# EAGLE board PowerNode2 (EAGLE 9.5.2)
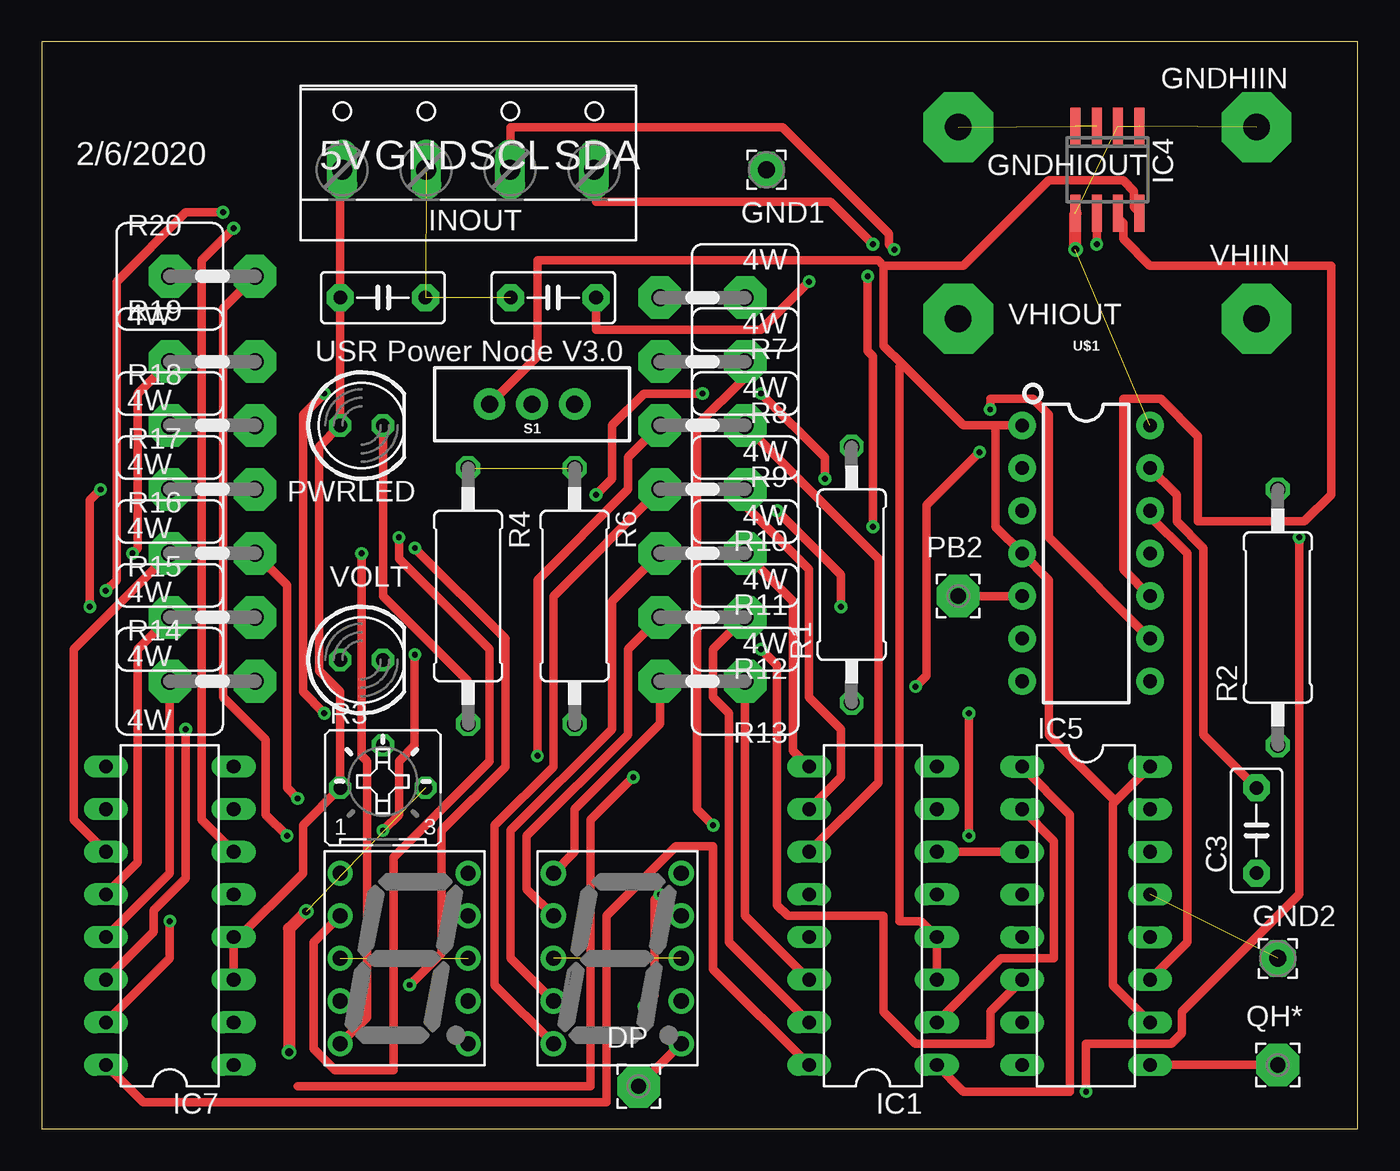
[diagram p0: board, top side]
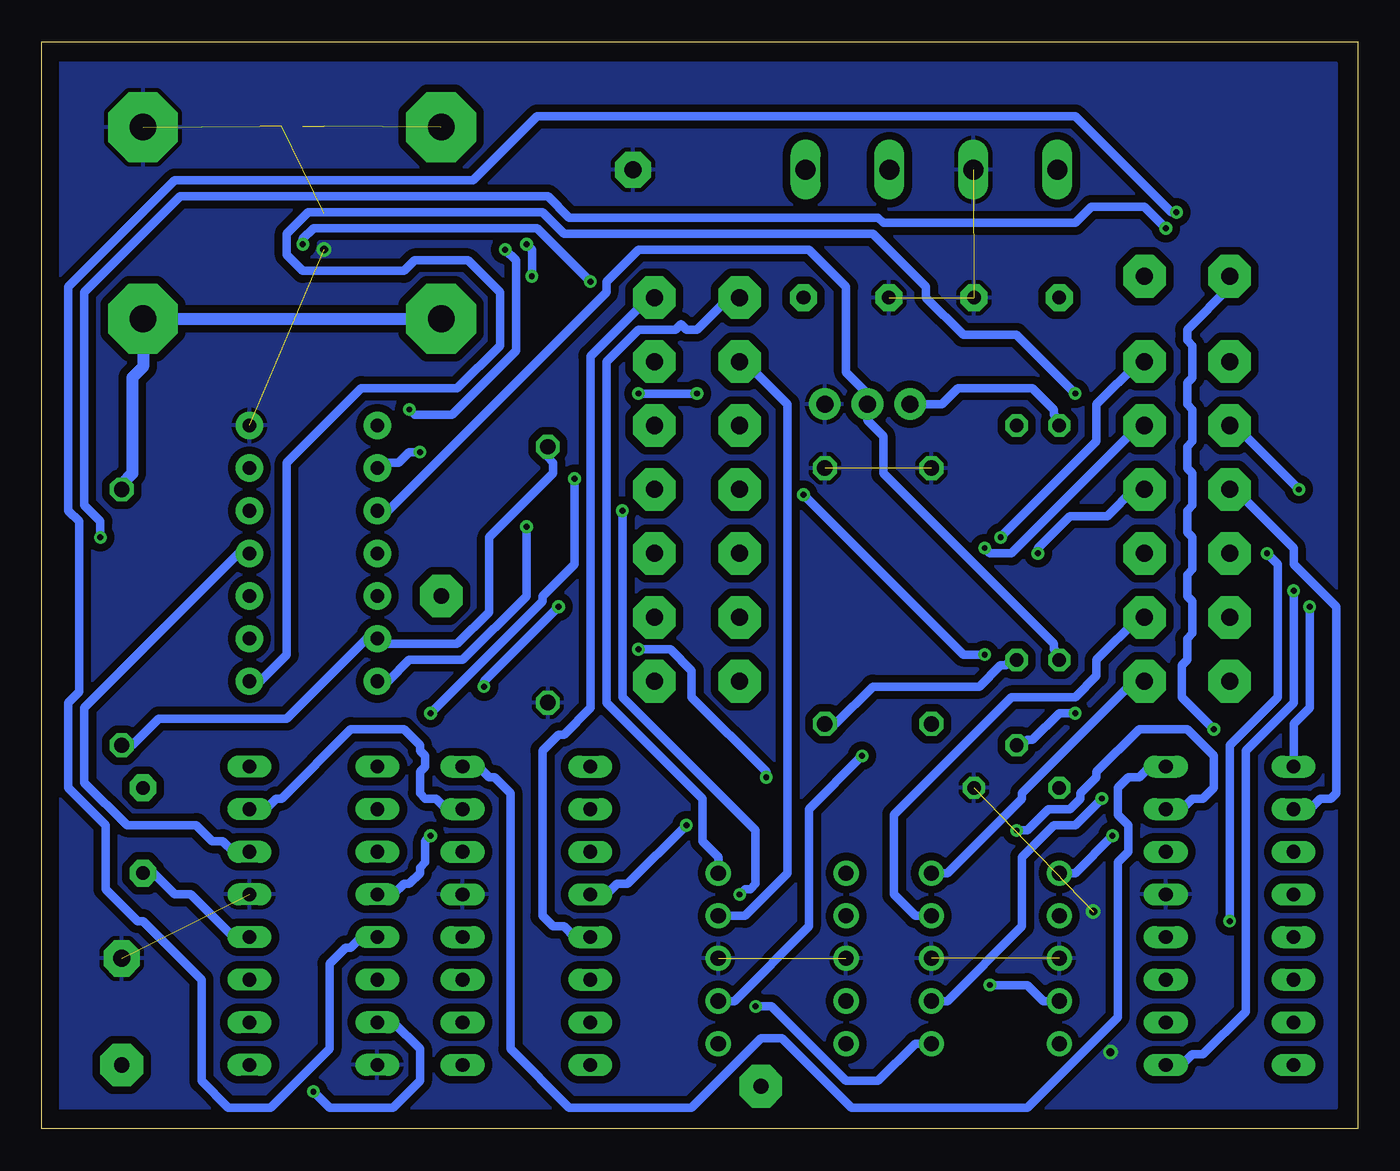
[diagram p1: board, bottom side, seen from below]

Size 78.41 x 64.76 mm. Coordinates in mm from the lower left corner, seen from the top.
Outline: 0,0 78.41,0 78.41,64.76 0,64.76 0,0
Copper layers (1*16): Top 0.035mm / dielectric 1.5mm / Bottom 0.035mm
Design rules "default": minimum track width 6mil, minimum drill 0.35mm, track to track 6mil, track to pad 6mil, pad to pad 6mil, via to via 6mil, smd to smd 6mil, copper to edge 40mil, drill to drill 6mil, minimum pad ring 10mil, minimum via ring 8mil, stop-mask expansion 4mil, vias tented up to drill 0mil, thermal gap 10mil
Net classes: 0 default: width 0.508 mm, drill 0.305 mm, clearance 0.305 mm; 1 high power: width 0.711 mm, drill 0.457 mm, clearance 0.457 mm
tRestrict: area 50.8,55.9 to 63,63.5; area 64,55.9 to 76.2,63.5; area 50.8,36.8 to 76.2,50.8

## Footprints (pad centres in the part's own frame; a part is rotated, then mirrored left to right if it is on the bottom)
C5B3 = drill 0.813 pad 1.6 octagon: 1 -2.54,0; 2 2.54,0
2,54/0,9 = drill 0.914 pad 2.54 octagon: 1 0,0
2,15/1,0 = drill 1.016 pad 2.159 octagon: 1 0,0
4,16O1,6 = drill 1.6 pad 4.166 octagon: 1 0,0
DIL16 = drill 0.813 long: 1 -8.89,-3.81; 2 -6.35,-3.81; 3 -3.81,-3.81; 4 -1.27,-3.81; 5 1.27,-3.81; 6 3.81,-3.81; 7 6.35,-3.81; 8 8.89,-3.81; 9 8.89,3.81; 10 6.35,3.81; 11 3.81,3.81; 12 1.27,3.81; 13 -1.27,3.81; 14 -3.81,3.81; 15 -6.35,3.81; 16 -8.89,3.81
SOIC8 = smd 0.6 x 2.2: 1 -1.905,-2.6; 2 -0.635,-2.6; 3 0.635,-2.6; 4 1.905,-2.6; 5 1.905,2.6; 6 0.635,2.6; 7 -0.635,2.6; 8 -1.905,2.6
W237-4 = drill 1.194 long: 1 -7.5,-1.27; 2 -2.5,-1.27; 3 2.5,-1.27; 4 7.5,-1.27
S4301B = drill 0.9 pad 1.5: 1 -3.81,5.08; 2 -3.81,2.54; 3 -3.81,0; 4 -3.81,-2.54; 5 -3.81,-5.08; 6 3.81,-5.08; 7 3.81,-2.54; 8 3.81,0; 9 3.81,2.54; 10 3.81,5.08
LED5MM = drill 0.813 octagon: A -1.27,0; K 1.27,0
0411/15 = drill 0.914 octagon: 1 -7.62,0; 2 7.62,0
B25P = drill 0.813 octagon: A -2.54,0; E 2.54,0; S 0,2.54
KH206-8R = drill 1.016 pad 2.54 octagon: 1 -2.54,0; 2 2.54,0
SWITCH_SPDT_PTH_11.6X4.0MM = drill 1.016 pad 1.88: 1 0,2.54; 2 0,0; 3 0,-2.54
DIP14 = drill 0.813 pad 1.626: 1 -7.62,-3.81; 2 -5.08,-3.81; 3 -2.54,-3.81; 4 0,-3.81; 5 2.54,-3.81; 6 5.08,-3.81; 7 7.62,-3.81; 8 7.62,3.81; 9 5.08,3.81; 10 2.54,3.81; 11 0,3.81; 12 -2.54,3.81; 13 -5.08,3.81; 14 -7.62,3.81

## Placement (x,y rotation side)
C1  1nF  [C5B3]  30.48,49.53 180 top
C2  0.1uF  [C5B3]  20.32,49.53 0 top
C3  0.1uF  [C5B3]  72.39,17.78 90 top
DP  [2,54/0,9]  35.56,2.54 0 top
GND1  [2,15/1,0]  43.18,57.15 0 top
GND2  [2,15/1,0]  73.66,10.16 0 top
GNDHIIN  WIREPAD4,16O1,6  [4,16O1,6]  72.39,59.69 0 top
GNDHIOUT  WIREPAD4,16O1,6  [4,16O1,6]  54.61,59.69 0 top
IC1  4511N  [DIL16]  49.53,12.7 90 top
IC4  ACS712-LC  [SOIC8]  63.5,57.15 180 top
IC5  74LS595N  [DIL16]  62.23,12.7 270 top
IC7  4511N  [DIL16]  7.62,12.7 90 top
INOUT  [W237-4]  25.4,58.42 0 top
LED1  S4301B  [S4301B]  34.29,10.16 0 top
LED2  S4301B  [S4301B]  21.59,10.16 0 top
PB2  [2,54/0,9]  54.61,31.75 0 top
PWRLED  [LED5MM]  19.05,41.91 0 top
QH*  [2,54/0,9]  73.66,3.81 0 top
R1  300k  [0411/15]  48.26,33.02 90 top
R2  1.2M  [0411/15]  73.66,30.48 90 top
R3  [B25P]  20.32,20.32 0 top
R4  330  [0411/15]  25.4,31.75 270 top
R6  330  [0411/15]  31.75,31.75 270 top
R7  330  [KH206-8R]  39.37,49.53 180 top
R8  300k  [KH206-8R]  39.37,45.72 180 top
R9  300k  [KH206-8R]  39.37,41.91 180 top
R10  300k  [KH206-8R]  39.37,38.1 180 top
R11  300k  [KH206-8R]  39.37,34.29 180 top
R12  300k  [KH206-8R]  39.37,30.48 180 top
R13  300k  [KH206-8R]  39.37,26.67 180 top
R14  300k  [KH206-8R]  10.16,26.67 0 top
R15  300k  [KH206-8R]  10.16,30.48 0 top
R16  300k  [KH206-8R]  10.16,34.29 0 top
R17  300k  [KH206-8R]  10.16,38.1 0 top
R18  300k  [KH206-8R]  10.16,41.91 0 top
R19  300k  [KH206-8R]  10.16,45.72 0 top
R20  300k  [KH206-8R]  10.16,50.8 0 top
S1  [SWITCH_SPDT_PTH_11.6X4.0MM]  29.21,43.18 90 top
U$1  ATTINY84ATTINY84-20PU  [DIP14]  62.23,34.29 270 top
VHIIN  WIREPAD4,16O1,6  [4,16O1,6]  72.39,48.26 0 top
VHIOUT  WIREPAD4,16O1,6  [4,16O1,6]  54.61,48.26 0 top
VOLT  [LED5MM]  19.05,27.94 0 top

## Library data of the parts
C1-C3 = capacitor-wima
DP GND1 GND2 GNDHIIN GNDHIOUT PB2 QH* VHIIN VHIOUT = wirepad
IC1 IC7 = 45xx
IC4 = allegro-2
IC5 = 74xx-us
INOUT = con-wago-500; OC_FARNELL: unknown; OC_NEWARK: unknown
LED1 LED2 = led-7-segment; OC_FARNELL: unknown; OC_NEWARK: unknown
PWRLED VOLT = led
R1 R2 R4 R6 = resistor
R3 = pot
R7-R20 = resistor-power; OC_FARNELL: unknown; OC_NEWARK: unknown
S1 = SparkFun-Switches; PROD_ID: SWCH-08261; SF_SKU: COM-00102
U$1 = SparkFun-IC-Microcontroller

## Nets
CALIB: R3.S U$1.8
CURRIN: IC4.7 U$1.10
DISPSEL: S1.2 U$1.3 VOLT.A
GND [high power]: C1.2 C2.2 GND1.1 GND2.1 GNDHIIN.1 IC1.5 IC4.1 IC4.2 IC4.5 IC5.8 IC5.13 IC7.5 INOUT.2 LED1.3 LED1.8 LED2.3 LED2.8 R1.1 R3.E R4.1 R6.1 S1.3 U$1.14
GNDHIOUT: GNDHIOUT.1 IC4.3 IC4.4
N$1: C1.1 IC4.6
N$2: IC5.14 U$1.11
N$3: IC1.13 R7.1
N$5: IC1.12 R8.1
N$7: IC1.11 R9.1
N$8: IC1.10 R10.1
N$9: IC1.9 R11.1
N$10: IC1.15 R12.1
N$11: IC1.14 R13.1
N$12: IC1.7 IC5.15
N$13: IC1.1 IC5.1
N$14: IC1.2 IC5.2
N$15: IC1.6 IC5.3
N$16: LED1.10 R7.2
N$17: LED1.9 R8.2
N$18: LED1.7 R9.2
N$19: LED1.5 R10.2
N$20: LED1.4 R11.2
N$21: LED1.2 R12.2
N$22: LED1.1 R13.2
N$23: IC7.13 R14.1
N$24: IC7.12 R15.1
N$25: IC7.11 R16.1
N$26: IC7.10 R17.1
N$27: IC7.9 R18.1
N$28: IC5.11 U$1.12
N$29: C3.1 IC5.12
N$30: C3.2 U$1.13
N$31: LED2.6 U$1.2
N$32: PB2.1 U$1.5
N$33: PWRLED.K R4.2
N$35: R6.2 VOLT.K
N$37: IC5.9 QH*.1
N$38: IC7.15 R19.1
N$39: DP.1 LED1.6
N$40: IC7.14 R20.1
N$41: LED2.10 R14.2
N$42: LED2.9 R15.2
N$43: LED2.7 R16.2
N$44: LED2.5 R17.2
N$45: LED2.4 R18.2
N$46: LED2.2 R19.2
N$47: LED2.1 R20.2
N$48: IC5.4 IC7.7
N$49: IC5.5 IC7.1
N$50: IC5.6
N$51: IC5.7 IC7.6
SCL: INOUT.3 U$1.9
SDA: INOUT.4 U$1.7
VCC: C2.1 IC1.3 IC1.4 IC4.8 IC5.10 IC5.16 IC7.3 IC7.4 INOUT.1 PWRLED.A R3.A S1.1 U$1.1 U$1.4
VDD: IC1.16 IC7.16
VHI [high power]: R2.2 VHIIN.1 VHIOUT.1
VHIOUT: R1.2 R2.1 U$1.6
VSS: IC1.8 IC7.8

## Tracks (layer width: path | path; a pad name or v marks a point on that pad's centre or on a via)
CALIB  (via drill 0.35)
  Top 0.508: v16.83,24.77 15.56,26.04 15.56,42.55 v16.83,43.81
  Bottom 0.508: R3.S 20,22.86 19.68,23.18 19.37,23.18 17.78,24.77 v16.83,24.77 | v16.83,43.81 20.32,47.31 23.5,47.31 25.72,49.53 25.72,50.16 28.89,53.34 47.31,53.34 48.58,54.61 62.55,54.61 63.82,53.34 63.82,52.07 62.87,51.12 56.83,51.12 56.2,51.75 53.02,51.75 51.12,49.85 51.12,46.67 53.66,44.13 59.37,44.13 63.82,39.69 63.82,28.26 65.41,26.67 U$1.8
CURRIN
  Top 0.508: U$1.10 64.45,33.34 64.45,43.5 66.67,43.5 68.9,41.27 68.9,36.2 75.25,36.2 76.83,37.78 76.83,51.44 66.04,51.44 64.45,53.02 64.45,53.98 64.14,54.29 IC4.7
DISPSEL
  Bottom 0.508: VOLT.A 17.78,28.26 18.1,28.57 18.1,28.89 28.26,39.05 28.26,41.27 29.21,42.23 S1.2 29.21,43.81 30.48,45.09 30.48,50.16 32.7,52.39 42.86,52.39 44.77,50.48 44.77,49.85 57.78,36.83 U$1.3
GND  (via drill 0.46)  (11 unrouted)
  Top 0.711: v61.59,52.39 IC4.5 | v15.75,12.95 14.73,11.94 v14.73,4.57
  pour Bottom: 1.27,63.5 77.47,63.5 77.47,1.27 1.27,1.27
  pour Top: 76.2,60.96 73.66,63.5 64.77,63.5 64.01,62.74 64.01,57.91 64.77,57.15 68.58,57.15 69.85,55.88 74.93,55.88 76.2,57.15
GNDHIOUT  (2 unrouted)
  pour Top: 50.8,60.96 53.34,63.5 62.23,63.5 62.99,62.74 62.99,57.91 62.23,57.15 59.69,57.15 58.42,55.88 52.07,55.88 50.8,57.15
N$1  (via drill 0.35)
  Top 0.508: v62.87,52.7 IC4.6 | v45.72,50.48 42.86,47.62 33.02,47.62 C1.1
  Bottom 0.508: v62.87,52.7 62.87,53.02 62.23,53.66 48.9,53.66 v45.72,50.48
N$2
  Bottom 0.508: IC5.14 66.99,16.51 67.63,17.14 68.26,17.14 69.22,18.1 73.34,18.1 75.88,20.64 75.88,25.08 66.67,34.29 U$1.11
N$3
  Bottom 0.508: IC1.13 46.67,11.43 47.31,12.06 47.94,12.06 48.58,12.7 48.58,22.54 47.62,23.5 47.31,23.5 45.72,25.08 45.72,46.04 42.23,49.53 R7.1
N$5  (via drill 0.35)
  Top 0.508: v40.01,18.1 39.05,19.05 39.05,41.91 41.91,44.77 R8.1
  Bottom 0.508: IC1.12 44.77,13.97 44.13,14.61 43.5,14.61 v40.01,18.1
N$7
  Top 0.508: IC1.11 49.85,20.64 49.85,33.97 R9.1
N$8
  Top 0.508: IC1.10 47.62,20.95 47.62,23.81 45.72,25.72 45.72,33.34 41.91,37.15 R10.1
N$9
  Top 0.508: IC1.9 44.77,22.54 44.77,31.43 R11.1
N$10
  Top 0.508: IC1.15 40.96,11.11 40.96,24.77 40.01,25.72 40.01,28.57 R12.1
N$11
  Top 0.508: IC1.14 41.91,12.7 R13.1
N$12
  Bottom 0.508: IC1.7 54.29,19.05 54.93,19.68 55.56,19.68 55.88,20 55.88,21.27 55.56,21.59 55.56,22.23 55.88,22.54 55.88,22.86 56.83,23.81 60.01,23.81 64.14,19.68 64.45,19.68 65.09,19.05 IC5.15
N$13
  Top 0.508: IC1.1 54.93,2.22 61.28,2.22 61.28,18.73 IC5.1
N$14
  Top 0.508: IC1.2 57.15,10.16 60.33,10.16 60.33,17.14 IC5.2
N$15
  Top 0.508: IC5.3 IC1.6
N$16
  Bottom 0.508: LED1.10 38.1,16.19 39.05,17.14 39.05,19.68 44.77,25.4 44.77,45.72 42.86,47.62 40.64,47.62 40.32,47.94 40.01,47.62 39.37,47.62 37.47,49.53 R7.2
N$17
  Bottom 0.508: LED1.9 36.51,12.7 33.97,15.24 33.97,43.18 36.51,45.72 R8.2
N$18  (via drill 0.35)
  Top 0.508: v29.53,22.23 29.53,32.7 34.92,38.1 34.92,40.01 R9.2
  Bottom 0.508: LED1.7 37.15,7.62 32.7,12.06 32.7,19.05 v29.53,22.23
N$19
  Top 0.508: LED1.5 26.99,8.57 26.99,18.1 30.48,21.59 30.48,31.75 R10.2
N$20
  Top 0.508: LED1.4 27.94,10.16 27.94,17.78 33.97,23.81 33.97,31.43 R11.2
N$21
  Top 0.508: LED1.2 28.89,14.29 28.89,17.46 34.92,23.5 34.92,28.57 R12.2
N$22
  Top 0.508: LED1.1 31.75,16.51 31.75,19.05 36.83,24.13 R13.2
N$23
  Top 0.508: IC7.13 7.62,15.24 R14.1
N$24
  Top 0.508: IC7.12 5.71,15.88 5.71,28.57 R15.1
N$25
  Top 0.508: IC7.11 1.91,18.41 1.91,28.57 R16.1
N$26
  Bottom 0.508: IC7.10 2.86,19.05 2.22,19.68 1.59,19.68 1.27,20 1.27,31.11 3.81,33.66 3.81,34.61 7.3,38.1 R17.1
N$27  (via drill 0.35)
  Top 0.508: v2.86,31.11 2.86,37.47 v3.49,38.1
  Bottom 0.508: IC7.9 3.81,24.13 2.86,25.08 v2.86,31.11 | v3.49,38.1 7.3,41.91 R18.1
N$28
  Top 0.508: IC5.11 68.26,11.11 68.26,34.29 66.04,36.51 U$1.12
N$29
  Bottom 0.508: IC5.12 66.99,11.43 69.53,13.97 70.48,13.97 71.75,15.24 C3.1
N$30
  Top 0.508: C3.2 69.22,23.5 69.22,34.61 67.63,36.2 67.63,37.78 U$1.13
N$31  (via drill 0.35)
  Top 0.508: v35.88,7.3 36.51,7.94 36.51,13.65 v36.83,13.97 | v43.81,36.83 47.62,33.02 v47.62,31.11 | v52.07,26.35 52.7,26.99 52.7,37.15 v55.88,40.32
  Bottom 0.508: LED2.6 26.35,5.08 28.57,2.86 30.48,2.86 34.92,7.3 v35.88,7.3 | v36.83,13.97 36.51,14.29 36.2,14.29 35.88,14.61 35.88,17.78 43.81,25.72 v43.81,36.83 | v47.62,31.11 52.07,26.67 v52.07,26.35 | v55.88,40.32 56.52,40.32 57.15,39.69 58.1,39.69 U$1.2
N$32
  Top 0.508: PB2.1 U$1.5
N$33
  Top 0.508: PWRLED.K 20.32,31.75 25.4,26.67 R4.2
N$35
  Bottom 0.508: VOLT.K 20.64,27.94 20.95,27.62 21.27,27.62 22.54,26.35 28.89,26.35 31.11,24.13 R6.2
N$37
  Top 0.508: QH*.1 IC5.9
N$38  (via drill 0.35)
  Top 0.508: IC7.15 7.62,10.16 v7.62,12.38 | v5.4,34.29 5.71,34.61 5.71,43.81 R19.1
  Bottom 0.508: v7.62,12.38 7.62,22.86 4.76,25.72 4.76,33.66 v5.4,34.29
N$39
  Top 0.508: DP.1 LED1.6
N$40  (via drill 0.35)
  Top 0.508: IC7.14 6.67,11.75 6.67,13.02 8.57,14.92 v8.57,23.81
  Bottom 0.508: v8.57,23.81 10.48,25.72 10.48,27.62 10.16,27.94 10.16,29.21 9.84,29.53 9.84,31.43 10.16,31.75 10.16,33.02 9.84,33.34 9.84,35.24 10.16,35.56 10.16,36.83 9.84,37.15 9.84,39.05 10.16,39.37 10.16,40.64 9.84,40.96 9.84,42.86 10.16,43.18 10.16,44.45 9.84,44.77 9.84,46.67 10.16,46.99 10.16,47.62 7.62,50.16 R20.1
N$41
  Bottom 0.508: LED2.10 24.45,15.24 20,19.68 20,20 13.34,26.67 R14.2
N$42
  Bottom 0.508: LED2.9 26.35,12.7 27.62,13.97 27.62,18.73 20.64,25.72 16.83,25.72 15.56,26.99 15.56,27.94 13.02,30.48 R15.2
N$43  (via drill 0.35)
  Top 0.508: v15.24,19.68 14.61,20.32 14.61,32.38 R16.2
  Bottom 0.508: LED2.7 24.45,7.62 20,12.06 20,16.19 18.1,18.1 16.83,18.1 v15.24,19.68
N$44  (via drill 0.35)
  Top 0.508: LED2.5 19.37,6.67 19.37,21.91 19.05,22.23 v19.05,34.29
  Bottom 0.508: v19.05,34.29 19.05,34.61 17.14,36.51 14.92,36.51 13.34,38.1 R17.2
N$45  (via drill 0.35)
  Top 0.508: v21.91,8.57 23.81,10.48 23.81,17.78 27.62,21.59 27.62,29.21 v22.23,34.61
  Bottom 0.508: LED2.4 18.73,7.62 19.68,8.57 v21.91,8.57 | v22.23,34.61 21.91,34.29 20.64,34.29 13.02,41.91 R18.2
N$46  (via drill 0.35)
  Top 0.508: LED2.2 16.19,11.11 16.19,4.76 17.46,3.49 20.95,3.49 20.95,16.19 26.67,21.91 26.67,28.57 21.27,33.97 v21.27,35.24
  Bottom 0.508: v21.27,35.24 15.56,40.96 15.56,43.18 13.02,45.72 R19.2
N$47  (via drill 0.35)
  Top 0.508: v14.61,17.46 13.34,18.73 13.34,23.18 10.79,25.72 10.79,48.9 R20.2
  Bottom 0.508: LED2.1 16.83,15.24 v14.61,17.46
N$48  (via drill 0.35)
  Top 0.508: v20.32,17.78 21.27,18.73 21.27,21.91 22.23,22.86 v22.23,28.26 | v33.02,37.78 33.97,38.73 33.97,41.91 35.88,43.81 v39.37,43.81 | v42.86,43.81 46.67,40.01 v46.67,38.73 | v55.24,17.46 v55.24,24.77
  Bottom 0.508: IC7.7 10.48,19.05 9.84,19.68 9.21,19.68 8.57,20.32 8.57,22.23 10.16,23.81 13.02,23.81 15.56,21.27 15.56,20.95 16.51,20 16.51,19.68 17.14,19.05 18.41,19.05 19.68,17.78 v20.32,17.78 | v22.23,28.26 23.5,28.26 v33.02,37.78 | v42.86,43.81 v39.37,43.81 | v46.67,38.73 46.67,33.66 48.58,31.75 48.58,31.43 v55.24,24.77 | v55.24,17.46 55.56,17.14 55.56,15.88 55.88,15.56 55.88,15.24 56.52,14.61 56.83,14.61 57.47,13.97 IC5.4
N$49  (via drill 0.35)
  Top 0.508: v3.81,32.07 4.45,32.7 4.45,50.48 8.57,54.61 v10.79,54.61
  Bottom 0.508: IC7.1 10.48,3.81 9.84,4.45 9.21,4.45 6.67,6.99 6.67,22.54 3.81,25.4 v3.81,32.07 | v10.79,54.61 11.11,54.61 16.83,60.33 48.9,60.33 52.7,56.52 70.48,56.52 76.83,50.16 76.83,36.83 76.2,36.2 76.2,26.04 76.83,25.4 76.83,20.32 74.61,18.1 74.61,14.29 72.71,12.38 72.39,12.38 68.9,8.89 68.9,2.86 67.31,1.27 64.77,1.27 61.28,4.76 61.28,9.84 60.33,10.79 60.01,10.79 59.37,11.43 IC5.5
N$50  (via drill 0.35)
  Top 0.508: 15.24,2.54 32.7,2.54 32.7,18.41 v35.24,20.95 | v42.86,28.57 43.81,27.62 43.81,13.34 44.45,12.7 50.16,12.7 50.16,6.99 52.07,5.08 56.52,5.08 56.52,6.99 IC5.6
  Bottom 0.508: v35.24,20.95 35.24,21.27 39.69,25.72 39.69,27.3 40.96,28.57 v42.86,28.57
N$51  (via drill 0.35)
  Top 0.508: IC7.6 9.53,18.41 9.53,51.75 v11.43,53.66 | v74.93,35.24 74.93,13.97 67.94,6.99 67.94,5.71 67.31,5.08 62.23,5.08 v62.23,2.22
  Bottom 0.508: v11.43,53.66 12.7,54.93 15.88,54.93 16.83,53.98 28.26,53.98 28.57,54.29 46.99,54.29 48.26,55.56 70.17,55.56 75.88,49.85 75.88,37.15 74.93,36.2 v74.93,35.24 | v62.23,2.22 61.28,1.27 57.47,1.27 55.88,2.86 55.88,4.76 57.47,6.35 IC5.7
SCL  (via drill 0.35)
  Top 0.508: U$1.9 60.01,35.24 60.01,42.55 59.05,43.5 56.52,43.5 v56.52,42.86 | v50.8,52.39 50.48,52.7 50.48,53.34 44.13,59.69 27.94,59.69 27.94,57.15 INOUT.3
  Bottom 0.508: v56.52,42.86 56.2,42.55 53.98,42.55 50.16,46.35 50.16,51.75 v50.8,52.39
SDA  (via drill 0.35)
  Top 0.508: v49.53,35.88 49.53,46.04 49.21,46.35 v49.21,50.8 | v49.53,52.7 46.99,55.24 33.02,55.24 33.02,57.15 INOUT.4
  Bottom 0.508: U$1.7 57.78,26.67 56.52,27.94 53.34,27.94 49.53,31.75 v49.53,35.88 | v49.21,50.8 49.21,52.39 v49.53,52.7
VCC
  Top 0.508: IC5.10 63.82,8.57 63.82,19.37 63.98,19.53 | IC5.16 63.98,19.53 | IC1.3 IC1.4 52.39,12.38 51.12,12.38 51.12,45.4 51.28,45.56 | 50.16,51.44 54.93,51.44 60.01,56.52 64.45,56.52 65.09,55.88 65.09,54.93 65.41,54.61 IC4.8 | 50.16,51.44 50.16,46.67 51.28,45.56 | 51.28,45.56 54.93,41.91 56.83,41.91 | U$1.1 56.83,41.91 | 56.83,41.91 56.83,35.88 U$1.4 60.01,32.7 60.01,23.5 63.98,19.53 | 11.43,11.11 IC7.3 | 11.43,11.11 15.56,15.24 15.56,18.1 R3.A 17.78,26.04 16.51,27.3 16.51,40.64 PWRLED.A C2.1 17.78,57.15 INOUT.1 | 11.43,11.11 IC7.4 | 50.16,51.44 49.85,51.75 29.53,51.75 29.53,46.04 S1.1
  Bottom 0.508: S1.1 24.77,43.18 23.81,44.13 19.37,44.13 18.1,42.86 18.1,42.55 17.78,42.23 PWRLED.A
VDD
  Top 0.508: IC7.16 6.03,1.59 33.66,1.59 33.66,12.7 37.78,16.83 40.01,16.83 40.01,9.53 IC1.16
VHI
  Bottom 0.711: R2.2 73.66,38.42 73.03,39.05 73.03,44.77 72.39,45.4 VHIIN.1 VHIOUT.1
  pour Top: 52.07,50.8 73.66,50.8 76.2,48.26 76.2,38.1 74.93,36.83 72.39,36.83 71.12,38.1 71.12,44.45 68.58,46.99 58.42,46.99 57.15,45.72 52.07,45.72 50.8,46.99 50.8,49.53
VHIOUT
  Bottom 0.508: R1.2 48.26,40.01 47.94,39.69 47.94,39.05 51.75,35.24 51.75,30.8 53.66,28.89 58.1,28.89 U$1.6 59.05,29.21 63.82,24.45 71.44,24.45 73.03,22.86 R2.1
VSS
  Bottom 0.508: IC7.8 12.38,21.59 13.02,20.95 13.65,20.95 14.29,20.32 14.29,18.73 13.65,18.1 13.65,16.51 14.29,15.88 14.29,6.67 19.68,1.27 30.16,1.27 34.29,5.4 35.56,5.4 39.69,1.27 46.99,1.27 50.48,4.76 50.48,20 51.44,20.95 51.75,20.95 52.39,21.59 IC1.8

## Text on the board
tPlace: 2/6/2020 | 5V | USR Power Node V3.0
tNames: GND | SCL | SDA